# EAGLE board Controle de Temperatura com Arduino Uno (EAGLE 9.7.0)

Size 118.37 x 119.11 mm. Coordinates in mm from the lower left corner, seen from the top.
Outline: 0,0 118.38,0 118.38,119.11 0,119.11 0,0
Copper layers (1*16): Top 0.035mm / dielectric 1.5mm / Bottom 0.035mm
Design rules "default": minimum track width 6mil, minimum drill 0.35mm, track to track 6mil, track to pad 6mil, pad to pad 6mil, via to via 6mil, smd to smd 6mil, copper to edge 40mil, drill to drill 6mil, minimum pad ring 10mil, minimum via ring 8mil, stop-mask expansion 4mil, vias tented up to drill 0mil, thermal gap 10mil

## Footprints (pad centres in the part's own frame; a part is rotated, then mirrored left to right if it is on the bottom)
LEDRD254W60D565H860B = drill 0.981 pad 1.581: 1 -1.27,0; 2 1.27,0
LEDRD254W60D565H860B_Y = drill 0.981 pad 1.581: 1 -1.27,0; 2 1.27,0
LEDRD254W60D565H860B_G = drill 0.981 pad 1.581: 1 -1.27,0; 2 1.27,0
MOTOR = drill 1.118 pad 3.15 octagon: + 2.54,0; - -2.54,0
BATTERY-GENERIC = drill 1.118 pad 3.15 octagon: + 2.54,0; - -2.54,0
RESAD1016W63L850D250B = drill 0.83 pad 1.43: 1 -5.08,0; 2 5.08,0
HA-06-SM065 = drill 1 pad 1.676: 1 -2.54,-2.54; 2 0,2.54; 3 2.54,-2.54
SWITCH-MOMENTARY-PTH-6.5MM = drill 1.016 pad 1.88: 1 -3.251,2.261; 2 3.251,2.261; 3 -3.251,-2.261; 4 3.251,-2.261
TO92 = drill 0.813 octagon: 1 -1.27,0; 2 0,1.905; 3 1.27,0
ARDUINO-UNO-R3-SHIELD = drill 1.016 pad 1.88: 3.3V 24.13,-2.54; 5V 24.13,0; A0 24.13,12.7; A1 24.13,15.24; A2 24.13,17.78; A3 24.13,20.32; A4 24.13,22.86; A5 24.13,25.4; AREF -24.13,-13.97; D2 -24.13,20.32; D3 -24.13,17.78; D4 -24.13,15.24; D5 -24.13,12.7; D6 -24.13,10.16; D7 -24.13,7.62; D8 -24.13,3.81; D9 -24.13,1.27; D10 -24.13,-1.27; D11 -24.13,-3.81; D12 -24.13,-6.35; D13 -24.13,-8.89; GND@0 24.13,2.54; GND@1 24.13,5.08; GND@2 -24.13,-11.43; IOREF 24.13,-7.62; NC 24.13,-10.16; RES 24.13,-5.08; RX -24.13,25.4; SCL -24.13,-19.05; SDA -24.13,-16.51; TX -24.13,22.86; VIN 24.13,7.62

## Placement (x,y rotation side)
D1  RED  [LEDRD254W60D565H860B]  23.58,82.2 180 top
D2  YELLOW  [LEDRD254W60D565H860B_Y]  33.74,82.2 180 top
D3  GREEN  [LEDRD254W60D565H860B_G]  43.9,82.2 180 top
M1  MOTOR_HDR  [MOTOR]  45.17,99.98 0 top
P1  BATTERYGENERIC  [BATTERY-GENERIC]  110.12,32.03 180 top
R1  1k  [RESAD1016W63L850D250B]  62.95,89.82 90 top
R2  1k  [RESAD1016W63L850D250B]  22.31,74.58 90 top
R3  1k  [RESAD1016W63L850D250B]  32.47,74.58 90 top
R4  1k  [RESAD1016W63L850D250B]  42.63,74.58 90 top
R5  1k  [RESAD1016W63L850D250B]  75.65,110.14 90 top
RPOT1  250k  [HA-06-SM065]  88.58,24.83 0 top
S1  SWITCH_MOMENTARY  [SWITCH-MOMENTARY-PTH-6.5MM]  78.19,91.09 90 top
T1  NPN  [TO92]  62.95,99.98 0 top
U1  ARDUINO-UNO-R3-SHIELD  [ARDUINO-UNO-R3-SHIELD]  47.88,29.84 270 top

## Library data of the parts
D1 = Tinkercad; CATEGORY: Opto-Electronic; SUB-CATEGORY: LED; VALUE: LED_RED
D2 = Tinkercad; CATEGORY: Opto-Electronic; SUB-CATEGORY: LED; VALUE: LED_YELLOW
D3 = Tinkercad; CATEGORY: Opto-Electronic; SUB-CATEGORY: LED; VALUE: LED_GREEN
M1 P1 R1-R5 RPOT1 S1 U1 = Tinkercad
T1 = Tinkercad; CATEGORY: Transistor; SUB-CATEGORY: BJT; TYPE: NPN

## Nets
D1_C: D1.2 R2.2
D2_C: D2.2 R3.2
D3_C: D3.2 R4.2
M1_+: M1.+ T1.1
P1+: P1.+ RPOT1.1
P1-: P1.- R2.1 R3.1 R4.1 R5.2 RPOT1.3 T1.3 U1.GND@0 U1.GND@1 U1.GND@2
T1_B: R1.2 T1.2
U1_5V: M1.- S1.3 S1.4 U1.5V
U1_A5: RPOT1.2 U1.A5
U1_D3: R5.1 S1.1 S1.2 U1.D3
U1_D4: R1.1 U1.D4
U1_D8: D3.1 U1.D8
U1_D10: D2.1 U1.D10
U1_D13: D1.1 U1.D13

## Tracks (layer width: path | path; a pad name or v marks a point on that pad's centre or on a via)
D1_C  (1 unrouted)
D2_C  (1 unrouted)
D3_C  (1 unrouted)
M1_+  (1 unrouted)
P1+  (1 unrouted)
P1-  (9 unrouted)
T1_B  (1 unrouted)
U1_5V  (3 unrouted)
U1_A5  (1 unrouted)
U1_D3  (3 unrouted)
U1_D4  (1 unrouted)
U1_D8  (1 unrouted)
U1_D10  (1 unrouted)
U1_D13  (1 unrouted)